# Altium PCB vt18_cpu_board.PcbDoc (part 7 of 7)
Units mil, origin at the board's own origin, x right, y up, seen from the top; angles counter-clockwise.
Board outline 2283.46 x 2244.09 mil, 8 copper layers (Top Layer, GND1, Signal Layer 1, POWER1, POWER2, Signal Layer 2, GND2, Bottom Layer), stack 66.304 mil thick; 339 components, 286 nets, 1965 pads, 1047 vias.
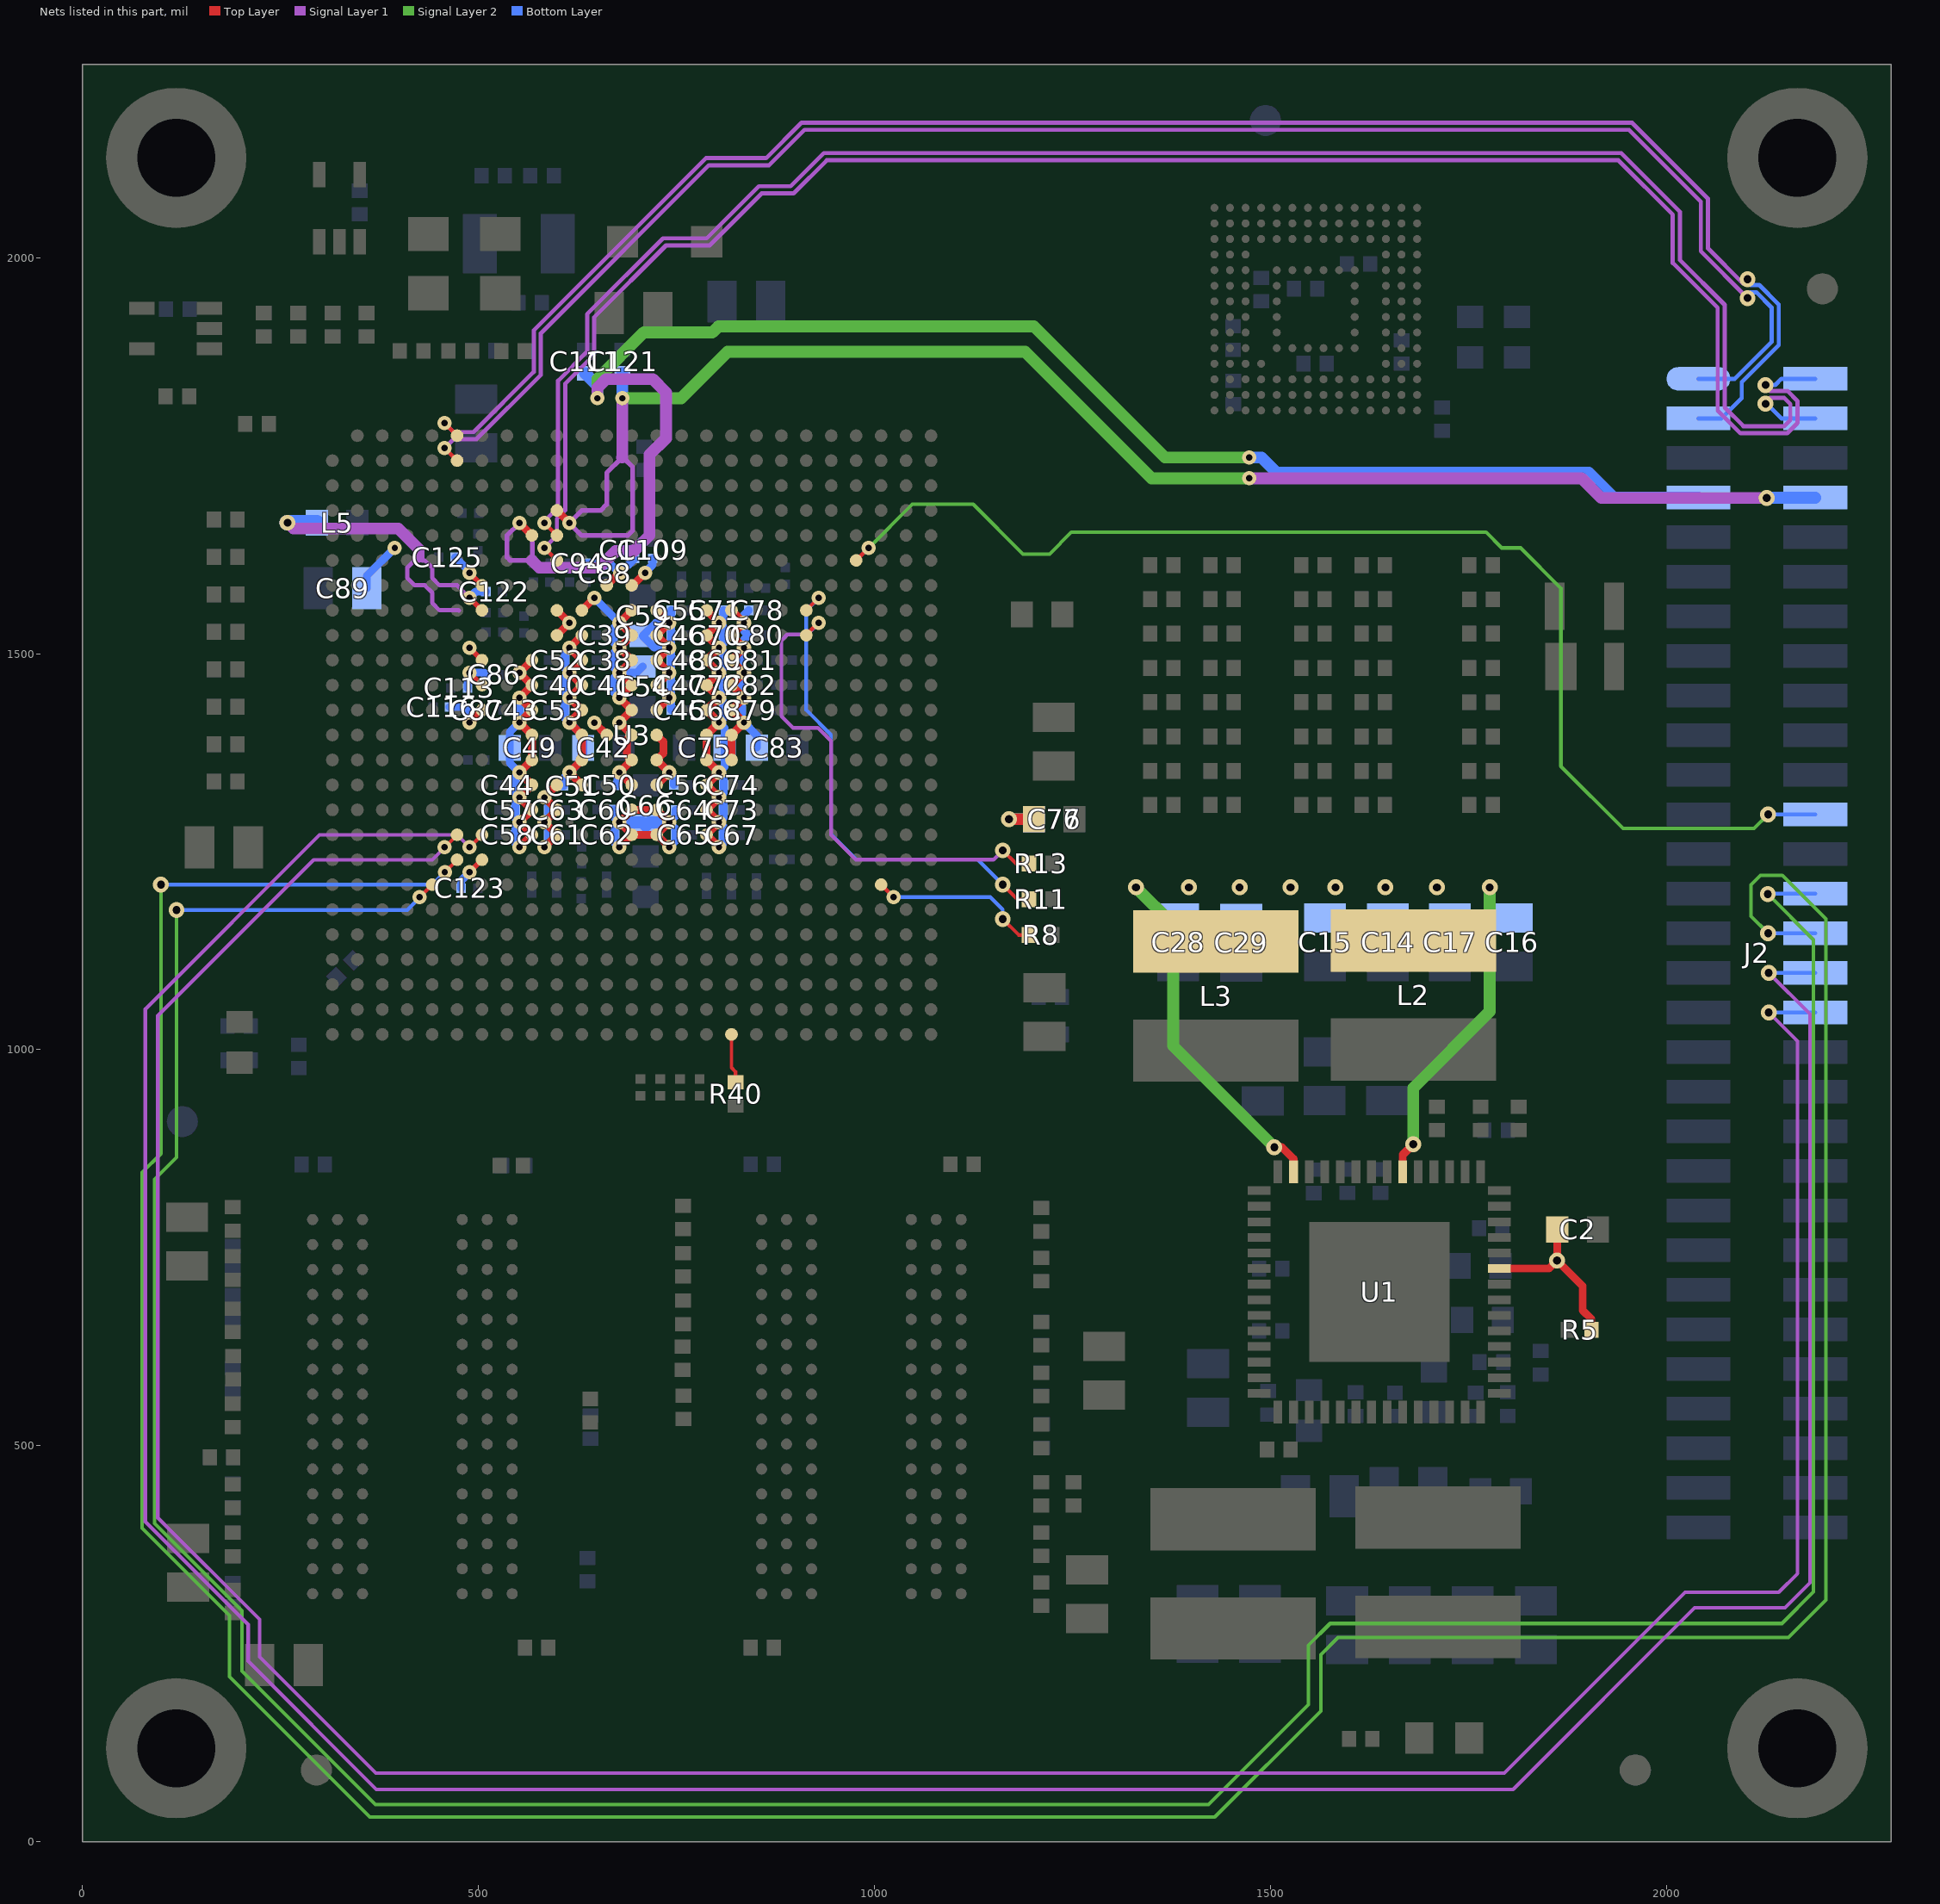
[diagram p13: the nets of this part, all layers, seen from the top]

## Via types
v1: diameter 18, hole 8, Top Layer to Bottom Layer, tented both sides, 718 vias
v2: diameter 20, hole 10, Top Layer to Bottom Layer, tented both sides, 300 vias
v3: diameter 25, hole 15, Top Layer to Bottom Layer, tented both sides, 27 vias
v4: diameter 17.99, hole 7.99, Top Layer to Bottom Layer, tented both sides, 2 vias

## Nets (pads, with @x,y where several pads share a name; then routed paths per layer and width w, separated by ;. In a path a pad name is that pad's centre, name@x,y a point inside that pad or via, vN(x,y) a via of type N, cw(c..) or ccw(c..) an arc to the next point about the centre after c; other vN are vias at no path point) (continued)
UART3-TXD: J2.24 U3.F22 | length 1572
  Top Layer w4.7: U3.F22@976.84,1617.81 v1(992.59,1633.57)
  Signal Layer 2 w4.5: v1(992.59,1633.57) 1047.71,1688.69 1124.58,1688.69 1187.57,1625.69 1220.94,1625.69 1248.5,1653.25 1772.12,1653.25 1791.81,1633.56 1815.82,1633.56 1866.61,1582.78 1866.61,1357.98 1945.35,1279.24 2110.52,1279.24 v2(2128.33,1297.05)
  Bottom Layer w4.7: v2(2128.33,1297.05) J2.24@2187.99,1297.05
UART4-RXD: J2.30 U3.V6 | length 4799
  Top Layer w4.7: v1@457.38,1224.11 v1(457.38,1224.33) U3.V6@472.91,1239.86
  Signal Layer 2 w4.5: v2(98.89,1208.37) 98.89,868.65 75.27,845.03 75.27,396.07 185.51,285.84 185.51,208.37 362.67,31.2 1429.6,31.2 1563.46,165.06 1563.46,236.22 1585.09,257.85 2153.86,257.85 2201.26,305.24 2201.26,1165.06 2146.14,1220.18 2118.58,1220.18 2106.77,1208.37 2106.77,1168.61 v2(2128.33,1147.05)
  Bottom Layer w4.7: v2(98.89,1208.37) 441.41,1208.36 v1(457.38,1224.33) ; v2(2128.33,1147.05) J2.30@2187.99,1147.05
UART4-TXD: J2.28 U3.W5 | length 4529.2
  Top Layer w4.7: v1(425.67,1192.62) U3.W5@441.41,1208.36
  Signal Layer 2 w4.5: v2(118.58,1176.47) 118.58,863.9 91.02,836.34 91.02,401.89 201.26,291.66 201.26,215.37 369.67,46.95 1421.73,46.95 1547.71,172.94 1547.71,248.03 1575.27,275.59 2145.67,275.59 2185.51,315.43 2185.51,1138.89 v2(2127.84,1196.56)
  Bottom Layer w4.7: v2(118.58,1176.47) 118.68,1176.37 409.91,1176.37 425.67,1192.13 v1(425.67,1192.62) ; v2(2127.84,1196.56) 2128.33,1197.05 J2.28@2187.99,1197.05
UART5-RXD: J2.34 U3.U6 | length 4224.9
  Top Layer w4.7: v1(457.16,1255.61) U3.U6@472.91,1271.36
  Signal Layer 1 w4.5: v1(457.16,1255.61) 441.41,1239.87 291.81,1239.87 94.96,1043.02 94.96,409.16 223.38,280.74 223.38,233.49 370.26,86.61 1795.28,86.61 2023.62,314.96 2141.73,314.96 2165.35,338.58 2165.35,1010.71 v2(2129.02,1047.05)
  Bottom Layer w4.7: v2(2129.02,1047.05) J2.34@2187.99,1047.05
UART5-TXD: J2.32 U3.U7 | length 4404.2
  Top Layer w4.7: v1(488.65,1255.61) U3.U7@504.4,1271.36
  Signal Layer 1 w4.5: v1(488.65,1255.61) 472.9,1271.36 299.28,1271.36 79.21,1051.29 79.21,404.16 209.13,274.23 209.13,228.06 371.01,66.17 1806.33,66.17 2035.43,295.28 2149.61,295.28 2181.1,326.77 2181.1,1044.96 v2(2129.02,1097.05)
  Bottom Layer w4.7: v2(2129.02,1097.05) J2.32@2187.99,1097.05
USB-H1-OC: R13.2 U3.J20 | length 644
  Top Layer w4.7: U3.J20@913.85,1523.32 913.85,1524.24 928.69,1539.08 v1(929.6,1539.08) ; v2(1161.88,1251.68) 1178.56,1235 R13.2@1195,1235
  Signal Layer 1 w4.7: v1(929.6,1539.08) 914.77,1524.24 889.86,1524.24 882.36,1516.74 882.36,1420.97 897.09,1406.24 928.51,1406.24 945.35,1389.39 945.35,1270.89 976.38,1239.87 1150.07,1239.87 v2(1161.88,1251.68)
USB-HOST-VBUS: C121.1 J2.8 U3.D10 | length 2046.5
  Top Layer w10: U3.D10@598.9,1680.8 v1(614.64,1665.06)
  Signal Layer 1 w6: 681.38,1747.74 661.88,1728.25 661.88,1688.69 654.01,1680.81 630.39,1680.81 v1(614.64,1665.06) 630.39,1649.32 688.53,1649.32 694.45,1655.24 694.45,1735.93 682.64,1747.74
  Signal Layer 1 w15: 681.38,1747.74 681.57,1747.93 v4(681.57,1822.54) ; v1(1472.91,1721.52) 1892.83,1721.52 1917.79,1696.56 v2(2126.45,1696.56)
  Signal Layer 2 w15: v4(681.57,1822.54) 755.61,1822.54 814.36,1881.29 1190.05,1881.29 1349.81,1721.52 v1(1472.91,1721.52)
  Bottom Layer w15: v4(681.57,1822.54) C121.1@681.57,1854.04 ; v2(2126.45,1696.56) 2126.94,1697.05 J2.8@2187.99,1697.05
USB-HOST_N: J2.2 U3.F10 | length 2344.5
  Top Layer w5.3: v1(583.14,1633.57) U3.F10@598.89,1617.81
  Signal Layer 1 w5.3: v1(583.14,1633.57) 598.89,1649.32 598.89,1670.46 609.38,1680.94 609.38,1840.9 646.14,1877.66 646.14,1924.91 736.69,2015.46 791.81,2015.46 857.61,2081.26 897.9,2081.26 939.69,2123.06 1939.19,2123.06 2007.87,2054.38 2007.87,1993.38 2064.5,1936.75 2064.5,1807.14 2093.3,1778.34 2152.36,1778.34 2165.35,1791.34 2165.35,1818.9 2152.42,1831.83 2130.39,1831.83 2125,1837.22 v2(2125,1839.18)
  Bottom Layer w5.3: v2(2125,1839.18) 2137.13,1839.18 2144.99,1847.05 J2.2@2187.99,1847.05
USB-HOST_P: J2.4 U3.E10 | length 2298.8
  Top Layer w5.3: v1(583.16,1665.06) U3.E10@598.89,1649.31
  Signal Layer 1 w5.3: v1(583.16,1665.06) 583.16,1667.45 600.38,1684.67 600.38,1844.63 637.14,1881.39 637.14,1928.63 732.96,2024.46 788.08,2024.46 853.88,2090.26 894.17,2090.26 935.97,2132.06 1942.92,2132.06 2016.87,2058.11 2016.87,1997.11 2073.5,1940.48 2073.5,1810.87 2097.03,1787.34 2148.63,1787.34 2156.35,1795.07 2156.35,1815.17 2148.69,1822.83 2130.39,1822.83 2125,1817.45 v2(2125,1815.48)
  Bottom Layer w5.3: v2(2125,1815.48) 2126.55,1815.48 2144.99,1797.05 J2.4@2187.99,1797.05
USB-OTG-ID: R8.2 U3.W23 | length 219.8
  Top Layer w4.7: U3.W23@1008.34,1208.36 v1(1024.09,1192.61) ; v2(1161.88,1165.06) 1181.95,1145 R8.2@1195,1145
  Bottom Layer w4.7: v1(1024.09,1192.61) 1146.15,1192.61 1161.88,1176.87 v2(1161.88,1165.06)
USB-OTG-OC: R11.2 U3.H20 | length 624.2
  Top Layer w4.5: U3.H20@913.85,1554.82 v1(929.6,1570.56)
  Top Layer w4.7: v2(1161.88,1208.37) 1180.26,1190 R11.2@1195,1190
  Bottom Layer w4.7: v1(929.6,1570.56) 913.87,1554.83 913.85,1428.84 944.95,1397.74 944.95,1272.16 976.85,1240.26 1129.99,1240.26 v2(1161.88,1208.37)
USB-OTG-VBUS: C111.1 J2.7 U3.E9 | length 2191.5
  Top Layer w10: v1(551.66,1665.04) U3.E9@567.4,1649.31
  Signal Layer 1 w6: 567.4,1617.82 539.84,1617.82 535.99,1621.67 535.99,1649.38 v1(551.66,1665.04) 567.84,1648.85 567.84,1625.35
  Signal Layer 1 w15: 567.4,1617.82 576.64,1608.58 651.96,1608.58 673.01,1629.63 696.06,1629.63 715.81,1649.38 715.81,1751.15 736.69,1772.03 736.69,1829.81 719.76,1846.74 661.03,1846.74 650.07,1835.79 v4(650.07,1822.54)
  Signal Layer 2 w15: v4(650.07,1822.54) 650.07,1846.92 708.66,1905.51 795.28,1905.51 803.15,1913.39 1201.26,1913.39 1366.9,1747.74 v1(1472.91,1747.74)
  Bottom Layer w5: v1(551.66,1665.04) v1@552.18,1665.04
  Bottom Layer w15: C111.1@634.33,1854.04 650.07,1838.29 v4(650.07,1822.54) ; v1(1472.91,1747.74) 1488.48,1747.74 1507.87,1728.35 1901.75,1728.35 1933.05,1697.05 J2.7@2040.35,1697.05
USB-OTG_N: J2.1 U3.B6 | length 2187.9
  Top Layer w5.3: v1(457.16,1759.55) U3.B6@472.91,1743.8
  Signal Layer 1 w5.3: v1(457.16,1759.55) 468.41,1770.8 497.47,1770.8 578.72,1852.05 578.72,1904.57 790.84,2116.69 866.89,2116.69 911.62,2161.42 1952.76,2161.42 2043.31,2070.87 2043.31,2008.11 v2(2102.36,1949.05)
  Bottom Layer w5.3: J2.1@2040.35,1847.05 2086.15,1847.05 2132.63,1893.53 2132.63,1937.18 2113.41,1956.4 2106.3,1956.4 2102.36,1952.46 v2(2102.36,1949.05)
USB-OTG_P: J2.3 U3.A6 | length 2245.4
  Top Layer w5.3: v1(457.16,1791.05) U3.A6@472.91,1775.29
  Signal Layer 1 w5.3: v1(457.16,1791.05) 468.41,1779.8 493.74,1779.8 569.72,1855.77 569.72,1908.3 787.11,2125.69 863.16,2125.69 907.89,2170.42 1956.48,2170.42 2052.31,2074.59 2052.31,2011.83 2096.83,1967.32 v2(2102.36,1972.85)
  Bottom Layer w5.3: J2.3@2040.35,1797.05 2069.46,1797.05 2094.96,1822.54 2094.96,1842.99 2141.73,1889.76 2141.73,1940.94 2117.18,1965.5 2106.3,1965.5 2102.36,1969.44 v2(2102.36,1972.85)
VCOREDIG: C2.1 R5.1 U1.51 | length 221.5
  Top Layer w10: U1.51@1789.02,723.67 1851.54,723.67 v2(1861.77,733.9) ; C2.1@1862.17,772.88 1862.17,734.3 v2(1861.77,733.9) ; R5.1@1905.08,646.5 1905.08,660.05 1894,671.14 1894,701.68 v2(1861.77,733.9)
VDDARM-CAP: C38.1 C39.1 C40.1 C41.1 C42.1 C50.1 C51.1 C52.1 C53.1 C54.1 U3.H11 U3.H13 U3.J11 U3.J13 U3.K11 U3.K13 U3.L11 U3.L13 U3.M11 U3.M13 U3.N11 U3.N13 U3.P11 U3.P13 U3.R11 U3.R13 | length 994.3
  Top Layer w10: U3.R11@630.39,1334.35 v1(614.64,1350.1) U3.P11@630.39,1365.84 U3.N11@630.39,1397.34 v1(614.64,1413.09) U3.M11@630.39,1428.84 v1(614.64,1444.58) U3.L11@630.39,1460.33 v1(614.64,1476.08) U3.K11@630.39,1491.83 v1(614.64,1507.58) U3.J11@630.39,1523.32 ; U3.H11@630.39,1554.82 v1(646.15,1570.57) ; U3.R13@693.38,1334.35 v1(677.63,1350.1) U3.P13@693.38,1365.84 687.38,1371.84 687.38,1391.34 U3.N13@693.38,1397.34 v1(677.63,1413.09) U3.M13@693.38,1428.84 v1(677.63,1444.58) U3.L13@693.38,1460.33 v1(677.63,1476.08) U3.K13@693.38,1491.83 v1(677.63,1507.58) U3.J13@693.38,1523.32 v1(677.63,1539.07) U3.H13@693.38,1554.82
  Bottom Layer w10: C51.1@607.38,1333 607.38,1342.84 v1(614.64,1350.1) 632.09,1367.55 C42.1@632.09,1381.12 632.09,1395.64 v1(614.64,1413.09) 608.81,1418.92 C53.1@608.81,1428.76 608.81,1438.76 v1(614.64,1444.58) 609.2,1450.02 C40.1@609.2,1460.26 609.2,1470.65 v1(614.64,1476.08) 609.2,1481.52 C52.1@609.2,1491.75 609.2,1502.15 v1(614.64,1507.58) ; v1(646.15,1570.57) v1(677.63,1539.07) 669.83,1531.28 C39.1@669.83,1523.25 669.83,1515.38 v1(677.63,1507.58) 669.83,1499.79 C38.1@669.83,1491.75 669.83,1483.88 v1(677.63,1476.08) ; C50.1@675.24,1333.85 675.24,1347.71 v1(677.63,1350.1) ; v1(677.63,1444.58) 670.23,1451.98 C41.1@670.23,1460.26 670.23,1468.68 v1(677.63,1476.08) ; C54.1@707.24,1483.88 699.44,1476.08 v1(677.63,1476.08)
VDDARM-SW1AB: C14.1 C15.1 C16.1 C17.1 C43.1 C44.1 C45.1 C46.1 C47.1 C48.1 C49.1 C55.1 C56.1 C57.1 C58.1 C59.1 L2.2 U1.6 U3.H14 U3.J14 U3.K9 U3.K14 U3.L9 U3.L14 U3.M9 U3.M14 U3.N9 U3.N14 U3.P9 U3.P14 U3.R9 U3.R14 U3.T9 U3.U9 | length 1432.2
  Top Layer w10: v1(551.65,1255.61) U3.U9@567.4,1271.36 v1(551.65,1287.1) U3.T9@567.4,1302.85 v1(551.65,1318.6) U3.R9@567.4,1334.35 v1(551.65,1350.1) U3.P9@567.4,1365.84 U3.N9@567.4,1397.34 v1(551.65,1413.09) U3.M9@567.4,1428.84 v1(551.65,1444.58) U3.L9@567.4,1460.33 v1(551.65,1476.08) U3.K9@567.4,1491.83 ; U3.R14@724.88,1334.35 v1(740.62,1350.1) ; U3.N14@724.88,1397.34 733.38,1388.84 733.38,1374.34 U3.P14@724.88,1365.84 v1(740.62,1350.1) ; U3.M14@724.88,1428.84 v1(740.62,1444.58) U3.L14@724.88,1460.33 v1(740.62,1476.08) U3.K14@724.88,1491.83 v1(740.62,1507.58) U3.J14@724.88,1523.32 v1(740.62,1539.07) U3.H14@724.88,1554.82 ; U1.6@1666.9,845.79 1666.9,867.29 v2(1680.28,880.67)
  Signal Layer 2 w15: v2(1680.28,880.67) 1680.28,951.91 1776.85,1048.48 v2(1776.85,1205)
  Bottom Layer w10: v1(551.65,1255.61) 546.61,1260.66 C58.1@546.61,1271.28 546.61,1282.06 v1(551.65,1287.1) 546.61,1292.15 C57.1@546.61,1302.78 546.61,1313.56 v1(551.65,1318.6) 546.21,1324.04 C44.1@546.21,1334.27 546.21,1344.67 v1(551.65,1350.1) 539.28,1362.48 C49.1@539.28,1381.12 539.28,1400.72 v1(551.65,1413.09) 551.72,1413.17 C43.1@551.72,1428.76 551.72,1444.51 v1(551.65,1444.58) ; v1(740.62,1350.1) 746.61,1344.12 C56.1@746.61,1334.27 ; C45.1@743.3,1428.76 743.3,1441.9 v1(740.62,1444.58) 743.3,1447.27 C47.1@743.3,1460.26 743.3,1473.4 v1(740.62,1476.08) 743.3,1478.77 C48.1@743.3,1491.75 743.3,1504.9 v1(740.62,1507.58) ; C55.1@743.3,1554.75 743.3,1541.76 v1(740.62,1539.07) ; v1(740.62,1507.58) 722.11,1507.58 C59.1@707.24,1522.46 723.85,1539.07 v1(740.62,1539.07) ; v1(740.62,1507.58) 743.3,1510.27 C46.1@743.3,1523.25 743.3,1536.39 v1(740.62,1539.07)
  other v2: 1582,1205 1645,1205 1710.09,1205
VDDHIGH-CAP: C87.1 C88.1 C89.1 C94.2 C110.1 C116.1 C123.1 C125.1 U3.G7 U3.G12 U3.H10 U3.J10 U3.K7 U3.M7 U3.V7 | length 389.9
  Top Layer w7: v1(488.65,1224.11) U3.V7@504.4,1239.86 ; v1(488.65,1507.58) U3.K7@504.4,1491.83 ; v1(488.65,1602.07) U3.G7@504.4,1586.32
  Top Layer w10: v1(488.65,1413.09) U3.M7@504.4,1428.84 ; U3.J10@598.89,1523.32 v1(614.65,1539.07) U3.H10@598.89,1554.82 ; U3.G12@661.88,1586.32 677.63,1602.07 v1(679,1602) v1(679,1602)
  Bottom Layer w10: C89.1@358.81,1582.7 358.81,1598.21 v1(394.17,1633.56) ; C116.1@463.54,1432.7 482.83,1432.7 C87.1@486.76,1428.76 488.65,1426.88 v1(488.65,1413.09) ; C125.1@470.62,1621.67 488.65,1603.65 v1(488.65,1602.07) ; C123.1@478.1,1203.96 478.1,1213.57 v1(488.65,1224.11) ; C94.2@635.34,1614.19 657.24,1614.19 C88.1@659.2,1612.23 667.48,1612.23 677.7,1602 678.9,1602 v1(679,1602) C110.1@697,1620.1
VDDPU-CAP: C78.1 C79.1 C80.1 C81.1 C82.1 C83.1 U3.H17 U3.J17 U3.K17 U3.L17 U3.M17 U3.N17 U3.P17 | length 448.9
  Top Layer w10: U3.P17@819.36,1365.84 U3.N17@819.36,1397.34 v1(835.11,1413.09) U3.M17@819.36,1428.84 v1(835.11,1444.58) U3.L17@819.36,1460.33 v1(835.11,1476.08) U3.K17@819.36,1491.83 v1(835.11,1507.58) U3.J17@819.36,1523.32 v1(835.11,1539.07) U3.H17@819.36,1554.82
  Bottom Layer w10: C78.1@841.09,1554.75 835.11,1548.76 v1(835.11,1539.07) 835.11,1528.84 C80.1@840.7,1523.25 835.11,1517.66 v1(835.11,1507.58) 832.04,1504.52 C81.1@832.04,1491.75 832.04,1479.15 v1(835.11,1476.08) 832.04,1473.02 C82.1@832.04,1460.26 832.04,1447.65 v1(835.11,1444.58) 832.04,1441.52 C79.1@832.04,1428.76 832.04,1416.16 v1(835.11,1413.09) 851.33,1396.87 C83.1@851.33,1381.52
VDDSOC-CAP: C60.1 C61.1 C62.1 C63.1 C64.1 C65.1 C66.1 C86.1 C109.1 C113.1 C122.1 L5.1 U3.G13 U3.H7 U3.L7 U3.N12 U3.R10 U3.T10 U3.T13 U3.T14 U3.U10 U3.U13 U3.U14 | length 1179.1
  Top Layer w7: v1(488.65,1476.08) U3.L7@504.4,1460.33 ; v1(488.65,1570.57) U3.H7@504.4,1554.82
  Top Layer w10: v1(583.14,1255.61) U3.U10@598.89,1271.36 v1(583.14,1287.1) U3.T10@598.89,1302.85 v1(583.14,1318.6) U3.R10@598.89,1334.35 ; v1(646.14,1412.85) 661.65,1397.34 U3.N12@661.88,1397.34 ; v1(677.63,1255.61) U3.U13@693.38,1271.36 ; U3.G13@693.38,1586.32 694.61,1586.32 v1(710.24,1601.96) ; v1(740.62,1255.61) U3.U14@724.88,1271.36 ; U3.U13@693.38,1271.36 U3.U14@724.88,1271.36 ; U3.U13@693.38,1271.36 v1(677.63,1287.1) U3.T13@693.38,1302.85 U3.T14@724.88,1302.85 v1(740.62,1287.1) U3.U14@724.88,1271.36
  Signal Layer 1 w5.5: 475,1554.58 474.71,1554.87 450.66,1554.87 441.46,1564.07 441.46,1576.97 432.06,1586.37 419.16,1586.37 409.96,1595.57 409.96,1608.58 419.16,1617.77 419.63,1617.77 424.38,1622.52 429.13,1617.77 432.16,1617.77 441.46,1608.48 441.46,1595.57 450.66,1586.37 472.85,1586.37 v1(488.65,1570.57)
  Signal Layer 1 w15: v2(258.81,1665.38) 266.19,1658 398.65,1658 424.38,1632.27 424.38,1622.52
  Bottom Layer w10: C113.1@485.98,1456.71 485.98,1473.41 v1(488.65,1476.08) 506.76,1476.08 C86.1@509.2,1473.64 ; v1(488.65,1570.57) 496.44,1578.37 C122.1@509.2,1578.37 ; v1(583.14,1255.61) 588.34,1260.81 C61.1@588.34,1271.28 588.34,1281.9 v1(583.14,1287.1) 588.34,1292.3 C63.1@588.34,1302.78 588.34,1313.4 v1(583.14,1318.6) ; C60.1@671.02,1303.17 671.02,1293.72 v1(677.63,1287.1) 672.2,1281.67 C62.1@672.2,1271.28 672.2,1261.05 v1(677.63,1255.61) ; v1@709.24,1601.96 709.74,1602.46 719.83,1612.55 C109.1@719.83,1620.1 ; v1(740.62,1255.61) 748.97,1263.96 C65.1@748.97,1271.28 748.97,1278.75 v1(740.62,1287.1) 748.97,1295.45 C64.1@748.97,1302.78
  Bottom Layer w15: v1(677.63,1287.1) 706.77,1287.1 C66.1@711.17,1282.7 715.58,1287.1 v1(740.62,1287.1)
  Bottom Layer w20: v2(258.81,1665.38) L5.1@295.82,1665.38
VDDSOC-SW1C: C28.1 C29.1 C67.1 C68.1 C69.1 C70.1 C71.1 C72.1 C73.1 C74.1 C75.1 C76.1 C77.1 L3.2 U1.13 U3.H16 U3.J16 U3.K16 U3.L16 U3.M16 U3.N16 U3.P16 U3.R16 U3.T16 U3.U16 | length 1260.6
  Top Layer w10: U3.H16@787.87,1554.82 v1(803.62,1539.07) U3.J16@787.87,1523.32 v1(803.62,1507.58) U3.K16@787.87,1491.83 v1(803.62,1476.08) U3.L16@787.87,1460.33 v1(803.62,1444.58) U3.M16@787.87,1428.84 v1(803.62,1413.09) U3.N16@787.87,1397.34 U3.P16@787.87,1365.84 v1(803.61,1350.1) U3.R16@787.87,1334.35 v1(803.62,1318.6) U3.T16@787.87,1302.85 v1(803.62,1287.1) U3.U16@787.87,1271.36 v1(803.62,1255.61) ; v2(1504.76,876.79) 1514.41,876.79 1529.1,862.1 U1.13@1529.1,845.79
  Top Layer w15: v2(1169.76,1291.05) C77.1@1201.26,1291.05
  Signal Layer 2 w15: v2(1330,1205) 1377,1158 1377,1004.55 v2(1504.76,876.79)
  Bottom Layer w10: v1(803.62,1255.61) 809.2,1261.2 C67.1@809.2,1270.89 809.2,1281.52 v1(803.62,1287.1) 809.2,1292.69 C73.1@809.2,1302.78 809.2,1313.02 v1(803.62,1318.6) 809.6,1324.58 C74.1@809.6,1334.27 809.6,1344.11 v1(803.61,1350.1) 810.78,1357.28 C75.1@810.78,1381.52 810.78,1405.93 v1(803.62,1413.09) 809.2,1418.68 C68.1@809.2,1428.76 809.2,1439 v1(803.62,1444.58) 809.2,1450.17 C72.1@809.2,1460.26 809.2,1470.5 v1(803.62,1476.08) 809.2,1481.67 C69.1@809.2,1491.75 809.2,1502 v1(803.62,1507.58) 809.2,1513.17 C70.1@809.2,1523.25 809.2,1533.49 v1(803.62,1539.07) 809.2,1544.66 C71.1@809.2,1554.75
  Bottom Layer w15: v2(1169.76,1291.05) C76.1@1201.26,1291.05
  other v2: 1397,1205 1461,1205 1525.24,1205
ZQPAD: R40.1 U3.AE17 | length 62.4
  Top Layer w4.7: U3.AE17@819.36,1019.39 819.36,977.36 824.38,972.34 R40.1@824.38,959.1
pads on no net: J2.43 J2.44 J2.45 J2.46 J2.48 U1.2 U1.16 U1.17 U1.18 U1.19 U1.21 U1.26 U1.27 U1.28 U1.33 U1.39 U1.44 U1.46 U2.A1 U2.A2 U2.A7 U2.A8 U2.A9 U2.A10 U2.A11 U2.A12 U2.A13 U2.A14 U2.B1 U2.B7 U2.B8 U2.B9 U2.B10 U2.B11 U2.B12 U2.B13 U2.B14 U2.C1 U2.C3 U2.C5 U2.C7 U2.C8 U2.C9 U2.C10 U2.C11 U2.C12 U2.C13 U2.C14 U2.D1 U2.D2 U2.D3 U2.D4 U2.D12 U2.D13 U2.D14 U2.E1 U2.E2 U2.E3 U2.E5 U2.E8 U2.E9 U2.E10 U2.E12 U2.E13 U2.E14 U2.F1 U2.F2 U2.F3 U2.F10 U2.F12 U2.F13 U2.F14 U2.G1 U2.G2 U2.G3 U2.G10 U2.G12 U2.G13 U2.G14 U2.H1 U2.H2 U2.H3 U2.H5 U2.H12 U2.H13 U2.H14 U2.J1 U2.J2 U2.J3 U2.J12 U2.J13 U2.J14 U2.K1 U2.K2 U2.K3 U2.K6 U2.K7 U2.K10 U2.K12 U2.K13 U2.K14 U2.L1 U2.L2 U2.L3 U2.L12 U2.L13 U2.L14 U2.M1 U2.M2 U2.M3 U2.M7 U2.M8 U2.M9 U2.M10 U2.M11 U2.M12 U2.M13 U2.M14 U2.N1 U2.N3 U2.N6 U2.N7 U2.N8 U2.N9 U2.N10 U2.N11 U2.N12 U2.N13 U2.N14 U2.P1 U2.P2 U2.P7 U2.P8 U2.P9 U2.P10 U2.P11 U2.P12 U2.P13 U2.P14 U3.A3 U3.A9 U3.A10 U3.A11 U3.A12 U3.A14 U3.A15 U3.A16 U3.A17 U3.A18 U3.A19 U3.A21 U3.A22 U3.A23 U3.A24 U3.AA1 U3.AA2 U3.AA3 U3.AA4 U3.AA11 U3.AB1 U3.AB2 U3.AB17 U3.AD17 U3.B1 U3.B2 U3.B3 U3.B8 U3.B9 U3.B10 U3.B11 U3.B12 U3.B13 U3.B14 U3.B15 U3.B16 U3.B18 U3.B21 U3.B22 U3.B23 U3.B24 U3.B25 U3.C5 U3.C7 U3.C8 U3.C13 U3.C15 U3.C16 U3.C17 U3.C18 U3.C20 U3.C21 U3.C22 U3.C23 U3.C24 U3.C25 U3.D1 U3.D2 U3.D5 U3.D7 U3.D13 U3.D14 U3.D15 U3.D16 U3.D17 U3.D20 U3.D21 U3.D22 U3.D23 U3.D24 U3.E1 U3.E2 U3.E3 U3.E4 U3.E13 U3.E14 U3.E15 U3.E17 U3.E19 U3.E20 U3.E21 U3.E23 U3.E24 U3.E25 U3.F1 U3.F2 U3.F3 U3.F4 U3.F13 U3.F14 U3.F15 U3.F16 U3.F18 U3.F19 U3.F20 U3.F21 U3.G1 U3.G2 U3.G6 U3.G20 U3.G21 U3.G23 U3.H1 U3.H2 U3.H3 U3.H4 U3.H5 U3.H19 U3.H21 U3.H24 U3.J3 U3.J4 U3.J5 U3.J6 U3.J19 U3.J23 U3.J24 U3.K3 U3.K4 U3.K5 U3.K6 U3.L1 U3.L3 U3.L4 U3.L6 U3.M2 U3.M4 U3.M5 U3.M6 U3.N1 U3.N2 U3.N3 U3.N4 U3.N19 U3.N20 U3.N21 U3.N22 U3.N25 U3.P1 U3.P2 U3.P3 U3.P4 U3.P25 U3.R1 U3.R2 U3.R6 U3.R20 U3.R21 U3.T1 U3.T2 U3.T4 U3.T5 U3.T20 U3.T21 U3.T22 U3.T23 U3.T24 U3.T25 U3.U1 U3.U2 U3.U3 U3.U4 U3.U20 U3.U21 U3.U22 U3.U23 U3.U24 U3.U25 U3.V1 U3.V2 U3.V3 U3.V4 U3.V20 U3.V21 U3.V22 U3.V23 U3.V24 U3.V25 U3.W1 U3.W2 U3.W4 U3.W6 U3.W20 U3.W21 U3.W22 U3.W24 U3.Y1 U3.Y2 U3.Y3 U3.Y4 U7.J1 U7.J9 U7.L1 U7.L9 U8.J1 U8.J9 U8.L1 U8.L9 U9.J1 U9.J9 U9.L1 U9.L9 U10.J1 U10.J9 U10.L1 U10.L9
copper on no net:
  other v1: 685.33,126.39 627.83,201.39 1100.33,271.39 1157.83,271.39 590.33,458.89 1160.38,481.34 162.83,551.39 405.33,583.89 741.63,908.89

## Polygon pours and split planes (outlines as drawn)
P3V0-VDDHIGH-SW2 on Top Layer "Top Layer-No Net 1" (solid, remove dead copper, pour order 27): 680,1890 641.1,1890 640,1890 635,1895 635,1915 620,1930 620,2075 620,2118.16 627.83,2125.98 692.4,2125.98 700,2118.38 700,2000 690,1990 690,1950 690,1895.12 684.88,1890
NetL3_1 on Top Layer "Top Layer-No Net" (solid, pour order 31): 1301.49,1043.17 1285.87,1027.55 1285.87,962.42 1285.87,942.08 1298.36,929.58 1308.26,919.68 1349.49,919.68 1565.63,919.68 1568.47,916.84 1568.47,942.17 1554.26,956.38 1537.37,973.27 1537.37,1005.81 1537.37,1032.86 1527.06,1043.17
NetL2_1 on Top Layer "Top Layer-No Net" (solid, pour order 32): 1601.5,1037.07 1786.22,1037.07 1794.45,1028.84 1794.45,950.79 1785.83,942.17 1692.43,942.17 1687.37,937.1 1648.03,937.1 1632.36,921.43 1632.36,870.98 1627.53,866.14 1610.13,866.14 1604.41,871.86 1604.41,903.34 1600.6,903.34 1578.11,925.83 1582,929.72 1582,948.03 1582,950.83 1572.32,960.5 1572.32,1032.4 1577,1037.07
NetL2_1 on Top Layer "Top Layer-No Net" (solid, pour order 33): 1578.11,925.83 1578.11,988.67 1587.37,997.92 1626.52,1037.07 1787.2,1037.07 1808.68,1037.07 1813.34,1032.41 1813.34,957.64 1803.74,948.03 1798.04,942.34 1786,942.34 1638.75,942.34 1612.68,916.27 1587.67,916.27 1582.51,921.43
VDDSOC-SW1C on Top Layer "Top Layer-No Net" (solid, pour order 35): 1326.76,1216 1529.73,1216 1537.37,1208.36 1537.37,1088.59 1534.34,1085.56 1316.75,1085.56 1304.56,1097.75 1304.56,1205.84 1307.08,1208.36
VDDARM-SW1AB on Top Layer "Top Layer-No Net" (solid, pour order 36): 1597.21,1216 1827.56,1216 1837.72,1205.84 1837.72,1102.16 1824.15,1088.59 1568.06,1088.59 1558.89,1097.75 1558.89,1208 1566.89,1216
NetL4_1 on Top Layer "Top Layer-No Net" (solid, pour order 39): 1341,708.66 1443.89,708.66 1456.98,695.57 1456.98,682.98 1452,678 1420.86,678 1412,669.14 1412,511.27 1436,487.27 1457.27,466 1513,466 1550.76,466 1564,452.76 1564,359.5 1558,353.5 1336.5,353.5 1329,361 1329,698.66 1339,708.66
NetL1_1 on Top Layer "Top Layer-No Net" (solid, pour order 42): 1620,499.26 1640.87,499.26 1648,492.13 1651,489.13 1651,482.05 1651,480 1660,471 1679.9,451.1 1798.04,451.1 1818.9,451.1 1826,444 1826,362.5 1822,358.5 1598.5,358.5 1591,366 1591,456 1611,476 1614.99,479.99 1614.99,494.59 1614.99,496.4 1617.84,499.26
P1V5-DDR-SW3 on Top Layer "Top Layer-No Net" (solid, pour order 44): 1628,315 1861,315 1866,310 1866,199 1859,192 1608,192 1601,199 1601,309 1607,315
P3V0-VDDHIGH-SW2 on Top Layer "Top Layer-No Net" (solid, pour order 46): 1369,314 1558.97,314 1565.63,307.34 1565.63,194.86 1558.77,188 1346,188 1340,194 1340,308 1346,314
GND on Top Layer "Top Layer-No Net 1" (solid, remove dead copper, pour order 29): 0,2240.16 0,0 2283.46,0 2283.46,2244.09
VDDSOC-SW1C on Bottom Layer "Top Layer-No Net" (solid, pour order 43): 1330,1217 1530,1217 1537,1210 1537,1201.87 1521,1185.87 1503,1167.87 1503,1157 1490.97,1144.97 1472.81,1144.97 1311.03,1144.97 1305,1151 1305,1210 1312,1217
VDDARM-SW1AB on Bottom Layer "Top Layer-No Net" (solid, pour order 45): 1594,1216 1829,1216 1839,1206 1839,1150 1833,1144 1544,1144 1539,1149 1539,1186 1552,1199 1569,1216 1580,1216
MAIN-POWER on Bottom Layer "Top Layer-No Net" (solid, pour order 48): 1453.54,955 1679.76,955 1682.76,952 1682.76,910.76 1664,892 1659,887 1659,874.07 1659,839.23 1656.77,837 1540.86,837 1536.86,841 1536.86,873.14 1516,894 1501,909 1468,909 1449.42,909 1447,911.42 1445,913.42 1445,950 1445,952 1448,955
GND on Bottom Layer "Top Layer-No Net" (solid, pour order 49): 1342,1127 1838,1127 1845,1120 1845,985 1837,977 1835.61,975.61 1338,975.61 1333.14,975.61 1323,985.75 1323,1120 1330,1127
MAIN-POWER on Bottom Layer "Top Layer-No Net" (solid, pour order 50): 1419,675.32 1486.35,675.32 1493.68,668 1495,666.68 1495,648 1495,604.13 1476.87,586 1471.96,581.09 1445,581.09 1396.91,581.09 1390,588 1390,662.32 1403,675.32
MAIN-POWER on Bottom Layer "Top Layer-No Net" (solid, pour order 51): 1589.61,548 1669.34,548 1672,545.34 1677,540.34 1677,510 1677,478.61 1671,472.61 1671,419.95 1662,410.95 1578.05,410.95 1571,418 1571,480.61 1578,487.61 1578,540 1586,548
GND on Bottom Layer "Top Layer-No Net" (solid, pour order 52): 1368.83,281.83 1860.83,281.83 1864,285 1864,450.96 1849.96,465 1804.66,465 1799,459.34 1799,403.54 1792.88,397.41 1737.2,397.41 1727,407.61 1727,469.17 1723,473.17 1686.72,473.17 1685,471.45 1682,468.45 1682,428 1682,410 1675,403 1668,396 1578,396 1563.15,396 1552,407.15 1552,469.17 1549,469.17 1512,469.17 1506,468.82 1352.93,468.82 1348,463.89 1348,288.83 1355,281.83
P3V0-VDDHIGH-SW2 on Bottom Layer "Top Layer-No Net" (solid, pour order 38): 1426,267 1522,267 1528,261 1528,194.34 1523,189.34 1370.3,189.34 1365.65,194 1365.65,263.03 1369.61,267
P1V5-DDR-SW3 on Bottom Layer "Top Layer-No Net" (solid, pour order 41): 1592,265 1866,265 1872,259 1872,200.34 1866,194.34 1567.66,194.34 1560,202 1560,256.11 1566.89,263 1568.89,265 1572,265
GND on Bottom Layer "Top Layer-No Net" (solid, pour order 47): 1433,837.04 1468.3,837.04 1474,831.34 1477.34,828 1683,828 1752.95,828 1762,818.95 1772,808.95 1772,763 1772,761 1767,756 1763,752 1763,633 1763,630.85 1769.85,624 1773,620.85 1773,612.58 1773,560 1771,558 1741,558 1733,566 1730,569 1691,569 1683,569 1678,564 1670.74,556.74 1659,556.74 1488.26,556.74 1485,560 1485,579.04 1497,591.04 1507.5,600 1507.5,630.85 1507.5,659 1507.5,734.5 1474,768 1427.5,814.5 1426.5,833.5 1429,837 1430,837
GND on Bottom Layer "Top Layer-No Net 1" (solid, remove dead copper, pour order 30): 0,0 2283.46,0 2283.46,2244.09 0,2244.09
VDDHIGH-CAP on Signal Layer 2 "Signal Layer 2-No Net" (solid, pour order 37): 471.56,1367.17 466.5,1372.24 466.5,1385.85 466.5,1403.74 465.03,1405.21 361.19,1509.05 361.19,1553.49 428.49,1553.49 437.85,1544.13 516,1465.98 516,1370 508.29,1362.29 483.59,1362.29 476.45,1362.29
VDDHIGH-CAP on Signal Layer 2 "Signal Layer 2-No Net" (solid, pour order 34): 385.61,1644 402.38,1644 411.38,1635 433.63,1612.75 604,1612 593.93,1622.07 604,1612 620,1596 648,1596 658.56,1596 674,1611.44 677.63,1614.22 689.78,1614.22 693.8,1610.2 696,1608 699,1605 699,1599 699,1178 694,1173 670.38,1173 489,1173 481,1181 471.39,1190.61 471.39,1218.79 471.39,1238.35 488.65,1255.61 500.38,1267.34 500.38,1291 500.38,1338.36 488.65,1350.09 471.56,1367.17 471.56,1396 471.56,1405.51 429.07,1448 361.19,1515.89 361.19,1621.32 361.19,1637.06 368.13,1644
VDDSOC-CAP on Signal Layer 1 "Signal Layer 2-No Net" (solid, pour order 40): 700,1602.07 700,1612 733.38,1612 752.7,1590 768,1590 780,1590 788,1582 791,1579 791,1508 791,1181.24 783.38,1173.62 509.89,1173.62 506,1177.51 506,1332.74 488.65,1350.09 469.95,1368.79 469.95,1390 469.95,1566.95 476,1573 485,1584.02 495.98,1584.02 514.91,1565.09 514.91,1534.09 524.78,1524.22 691.7,1524.22 700,1534.09
P3V0-VDDHIGH-SW2 on Signal Layer 1 "Top Layer-No Net 1" (solid, remove dead copper, pour order 28): 1870,1035.14 1968.97,1035.14 1972.91,1031.2 1972.91,948.53 1468.97,948.53 1405.98,885.54 1405.98,570.57 1539.84,436.72 1539.84,180.81 1531.96,172.94 1315.43,172.94 1307.55,180.81 1307.55,1003.65 1339.05,1035.14
GND on GND1 (split plane): 2263.37,20.1 20.1,20.1 20.1,2224 2263.37,2224
PMIC-VSNVS on POWER1 (split plane): 917.37,2040.42 917.37,1849.02 693.4,1625.05 617.78,1549.43 564.18,1603.03 562,1605.21 574.18,1617.4 712.74,1755.95 713.84,1757.61 714.23,1759.56 714.23,1808.02 824.6,1918.4 825.71,1920.05 826.1,1922 826.1,2005 825.71,2006.95 824.6,2008.6 822.95,2009.71 821,2010.1 729.51,2010.1 729.51,2024.59 729.51,2094.9 862.89,2094.9
NetC114_1 on POWER1 (split plane): 815.9,1924.11 705.53,1813.74 704.42,1812.08 704.03,1810.13 704.03,1761.67 566.97,1624.61 566.97,1624.6 557.46,1615.1 493.75,1678.82 493.75,1725.93 728.01,1960.19 729.12,1961.85 729.51,1963.8 729.51,1999.9 815.9,1999.9
VDDARM-CAP on POWER1 (split plane): 691.9,1551.89 691.9,1404.28 691.9,1265.7 588.24,1265.7 588.24,1401.86 588.24,1413.09 588.24,1505.47 603.6,1520.84 621.38,1538.62 663.28,1580.51
P1V5-DDR-SW3 on POWER1 (split plane): 890.96,1311.47 919.51,1282.92 919.51,1192.62 919.86,1190.01 920.86,1187.58 922.47,1185.49 922.48,1185.48 924.57,1183.87 927,1182.87 929.61,1182.52 1125.34,1182.52 1214,1093.87 1241.42,1066.45 1241.29,1065.51 1241.29,754.98 1241.29,725.62 1241.64,723.01 1242.64,720.58 1244.25,718.49 1421.87,540.87 1422.87,539.87 1424.96,538.26 1427.39,537.26 1430,536.91 1794.82,536.91 1863.91,467.82 1863.91,20.1 143.09,20.1 143.09,637.61 142.74,640.22 142.45,640.94 141.74,642.66 140.13,644.75 118.09,666.79 118.09,843.39 118.09,959.93 340.69,1182.54 488.66,1182.54 491.27,1182.88 493.7,1183.89 495.79,1185.49 555.83,1245.53 778,1245.53 780.61,1245.87 783.04,1246.88 785.13,1248.48 848.12,1311.47 863.56,1326.91 875.52,1326.91
P3V0-VDDHIGH-SW2 on POWER1 (split plane): 719.31,2100 719.31,2082.68 719.31,2024.59 719.31,2005 719.31,1965.91 485.04,1731.64 483.94,1729.99 483.55,1728.04 483.55,1676.71 483.94,1674.76 485.04,1673.1 550.65,1607.49 550.29,1606.95 549.9,1605 550.29,1603.05 551.39,1601.39 556.97,1595.82 610.57,1542.22 596.4,1528.05 581.03,1512.68 553.89,1512.68 552.77,1512.46 551.65,1512.68 533.9,1512.68 512.97,1533.61 512.97,1559.06 512.58,1561.01 511.48,1562.66 509.82,1563.76 507.87,1564.15 380.08,1564.15 367.77,1576.47 367.77,1869.27 550,2051.51 551.11,2053.17 551.5,2055.12 551.5,2136.63 719.31,2136.63
P3V3-PERI on POWER1 (split plane): 2263.37,20.1 1884.09,20.1 1884.09,472 1883.74,474.61 1882.74,477.04 1881.13,479.13 1806.13,554.13 1804.04,555.73 1801.61,556.74 1799,557.09 1434.18,557.09 1261.46,729.8 1261.46,754.98 1261.46,1061.43 1262.74,1063.09 1263.74,1065.52 1264.09,1068.13 1263.74,1070.74 1262.74,1073.17 1261.13,1075.26 1228.26,1108.13 1136.65,1199.74 1134.56,1201.34 1132.13,1202.35 1129.52,1202.69 939.68,1202.69 939.68,1287.1 939.34,1289.71 938.33,1292.14 936.73,1294.23 905.22,1325.74 886.83,1344.13 884.74,1345.74 882.31,1346.74 879.7,1347.09 859.39,1347.09 856.78,1346.74 854.34,1345.74 852.25,1344.13 833.86,1325.74 773.82,1265.7 702.1,1265.7 702.1,1404.28 702.1,1554 701.71,1555.95 700.6,1557.6 670.49,1587.72 700.6,1617.84 926.07,1843.31 927.18,1844.96 927.56,1846.91 927.56,2042.53 927.18,2044.48 926.07,2046.14 868.6,2103.6 866.95,2104.71 865,2105.1 729.51,2105.1 729.51,2141.73 729.12,2143.68 728.01,2145.34 726.36,2146.44 724.41,2146.83 546.4,2146.83 544.45,2146.44 542.8,2145.34 541.69,2143.68 541.3,2141.73 541.3,2057.23 359.06,1874.99 357.96,1873.34 357.57,1871.38 357.57,1576.88 357.49,1576.77 357.11,1574.82 357.49,1572.87 358.6,1571.22 374.37,1555.45 376.02,1554.35 377.97,1553.96 502.78,1553.96 502.78,1531.5 503.16,1529.55 504.27,1527.89 528.18,1503.98 529.84,1502.87 531.79,1502.49 551.65,1502.49 552.77,1502.71 553.89,1502.49 578.04,1502.49 578.04,1413.09 578.04,1401.86 578.04,1265.7 551.65,1265.7 549.04,1265.36 546.61,1264.35 544.52,1262.75 484.48,1202.71 336.51,1202.71 333.9,1202.37 331.47,1201.36 329.38,1199.76 100.87,971.24 99.27,969.15 98.26,966.72 97.91,964.11 97.91,843.39 97.91,662.61 98.26,660 99.27,657.57 100.87,655.48 122.91,633.44 122.91,20.1 20.1,20.1 20.1,2224 2263.37,2224
VDDARM-SW1AB on POWER2 (split plane): 1939.78,1773.01 1939.78,1173.57 1937.75,1172.01 1934.82,1169.09 1550.34,1169.09 1550.34,1538.95 1549.95,1540.9 1548.84,1542.55 1517.23,1574.17 1515.58,1575.27 1513.63,1575.66 815.25,1575.66 813.3,1575.27 811.65,1574.17 768.51,1531.03 767.41,1529.38 767.02,1527.43 767.02,1507.58 767.02,1202.71 526.17,1202.71 526.17,1474.89 553.76,1502.49 583.14,1502.49 585.09,1502.87 586.74,1503.98 618.23,1535.47 619.34,1537.12 619.72,1539.07 619.72,1570.57 619.34,1572.52 618.23,1574.17 586.72,1605.68 585.07,1606.78 583.12,1607.17 553.75,1607.17 525.25,1635.68 525.25,1841.73 616.42,1932.9 1779.89,1932.9
VDDSOC-SW1C on POWER2 (split plane): 1540.14,1536.84 1540.14,1169.09 1116.37,1169.09 1113.76,1168.74 1111.33,1167.74 1109.24,1166.13 1107.64,1164.04 1107.55,1163.83 1107.33,1163.74 1105.24,1162.13 1055.58,1112.47 999.79,1168.26 997.7,1169.86 995.27,1170.87 992.66,1171.21 933.78,1171.21 905.23,1199.76 903.14,1201.36 900.71,1202.37 898.1,1202.71 777.22,1202.71 777.22,1525.31 817.37,1565.46 1511.51,1565.46
MAIN-POWER on POWER2 (split plane): 1864.9,826.34 1865.29,824.39 1866.39,822.74 1868.05,821.63 1870,821.25 2263.37,821.25 2263.37,365.09 1589.07,365.09 1589.07,497.47 1588.73,500.08 1587.72,502.51 1586.12,504.6 1540.59,550.13 1538.5,551.73 1536.06,552.74 1533.45,553.09 1467.42,553.09 1283.76,736.74 1281.67,738.35 1279.24,739.36 1276.63,739.7 1245.79,739.7 1244.35,741.13 1187.09,798.4 1187.09,976.78 1186.74,979.39 1185.74,981.83 1184.13,983.91 1069.84,1098.2 1119.51,1147.87 1120.31,1148.91 1864.9,1148.91
P3V0-VDDHIGH-SW2 on POWER2 (split plane): 2099.9,1867.89 2099.9,1324 2099.9,1128 2099.9,831.44 1875.1,831.44 1875.1,1148.91 1939,1148.91 1941.61,1149.26 1944.04,1150.26 1946.13,1151.87 1952.01,1157.75 1953.62,1159.84 1954.62,1162.27 1954.97,1164.88 1954.62,1167.49 1953.62,1169.93 1952.01,1172.01 1949.98,1173.57 1949.98,1775.12 1949.59,1777.07 1948.49,1778.72 1785.6,1941.6 1783.95,1942.71 1782,1943.1 619.41,1943.1 619.41,2134.9 1832.89,2134.9
PMIC-VSNVS on POWER2 (split plane): 2263.37,831.44 2110.1,831.44 2110.1,1128 2110.1,1324 2110.1,1870 2109.71,1871.95 2108.6,1873.6 1838.6,2143.6 1836.95,2144.71 1835,2145.1 614.31,2145.1 612.36,2144.71 610.7,2143.6 609.6,2141.95 609.21,2140 609.21,1940.11 518.04,1848.94 259.58,1848.94 215.1,1893.42 215.1,2224 2263.37,2224
P0V75-REFDDR on POWER2 (split plane): 922.47,1153.99 924.55,1152.39 926.28,1151.68 926.99,1151.38 929.6,1151.04 988.48,1151.04 1166.91,972.6 1166.91,794.22 1167.26,791.61 1168.26,789.18 1169.87,787.09 1230.09,726.87 1234.48,722.48 1236.57,720.88 1237.78,720.37 1239,719.87 1241.61,719.53 1272.45,719.53 1456.11,535.87 1458.2,534.26 1460.63,533.26 1463.24,532.91 1529.28,532.91 1568.9,493.29 1568.9,285.16 1377.82,94.09 329.52,94.09 143.09,280.52 143.09,984.93 340.69,1182.54 893.92,1182.54
GND on POWER2 (split plane): 204.9,1891.31 205.29,1889.36 206.39,1887.71 253.87,1840.24 255.52,1839.13 257.47,1838.74 515.05,1838.74 515.05,1633.56 515.44,1631.61 516.55,1629.96 548.04,1598.47 549.69,1597.36 551.64,1596.98 581.01,1596.98 609.53,1568.46 609.53,1541.18 581.03,1512.68 551.65,1512.68 549.7,1512.29 548.05,1511.19 517.46,1480.6 516.36,1478.95 515.97,1477 515.97,1202.71 336.51,1202.71 333.9,1202.37 332.9,1201.95 331.47,1201.36 329.38,1199.76 125.87,996.24 124.27,994.15 123.26,991.72 122.91,989.11 122.91,276.34 123.26,273.73 124.27,271.3 125.87,269.21 318.21,76.87 320.3,75.26 322.73,74.26 325.34,73.91 1382,73.91 1384.61,74.26 1387.04,75.26 1389.13,76.87 1586.12,273.85 1587.72,275.94 1588.43,277.66 1588.73,278.37 1589.07,280.98 1589.07,344.91 2263.37,344.91 2263.37,20.1 20.1,20.1 20.1,2224 204.9,2224
GND on GND2 (split plane): 2263.37,20.1 20.1,20.1 20.1,2224 2263.37,2224

## Keep-outs
Keep-Out Layer:
  the board outline again, w5.91

## Other copper
Top Layer:
  pour cut-out: 2150.07,2008.39 2150.18,2008.49 2245.23,2008.49 2245.23,1914 2150.07,1914
  pour cut-out: 1912.72,137.59 1912.82,137.69 2007.87,137.69 2007.87,43.2 1912.72,43.2
  pour cut-out: 247.29,137.69 247.4,137.8 342.45,137.8 342.45,43.31 247.29,43.31
  pour cut-out: 193.49,976.95 165.35,948.82 165.35,854.33 215.77,803.91 1184.29,803.91 1184.29,892.95 1196.85,905.51 1196.85,976.38 1185,988.23 1185,1103.34 1185,1121.87 1184.29,1122.58 1114.17,1192.61 1113.77,1192.2 1113.77,976.95
  pour cut-out: 273.55,1817.82 1113.68,1817.82 1113.77,1817.73 1113.77,976.95 272.99,976.95
  pour cut-out: 1393.93,2094.47 1716.53,2094.5 1716.57,1775.64 1393.05,1775.55
Bottom Layer:
  pour cut-out: 1913.05,137.69 1913.16,137.8 2008.21,137.8 2008.21,43.31 1913.05,43.31
  pour cut-out: 78.74,956.69 173.89,956.8 173.89,862.31 126.32,862.31 78.74,862.31
  pour cut-out: 1444.22,2220.37 1444.32,2220.47 1539.37,2220.47 1539.37,2125.98 1444.22,2125.98
  pour cut-out: 272.99,976.95 273.56,976.38 1114.17,976.38 1114.17,1814.96 552.24,1814.96 532.55,1795.28 476.38,1795.28 476.38,1649.61 271.65,1649.61 271.65,1632.16
  pour cut-out: 320.82,826.77 320.82,986.17 381.89,1047.24 1045.48,1047.24 1128.16,1129.92 1174.4,1129.92 1188.98,1115.34 1188.98,1092.43 1169.29,1072.75 1169.29,1003.94 1207.38,965.85 1207.38,844.52 1181.75,818.9 320.82,818.9
  pour cut-out: 1727.46,1652 1751.11,1628.35 1751.11,1302.11 1745,1296 1687.73,1296 1678.28,1305.46 1678.28,1621.97 1667.87,1632.38 1667.87,1648.91 1670.96,1652
POWER1 (plane layer: these items are gaps in the copper):
  lines w10: 362.2,1574.82 377.97,1559.06 507.87,1559.06 507.87,1531.5 531.79,1507.58 551.65,1507.58 ; 362.67,1574.8 362.67,1871.38 546.4,2055.12 546.4,2141.73 724.41,2141.73 724.41,2082.68 ; 553.89,1507.58 583.14,1507.58 ; 555,1605 560.57,1599.42 617.78,1542.22 600,1524.45 583.14,1507.58 ; 583.14,1255.61 583.14,1401.86 583.14,1413.09 583.14,1507.58 ; 615.28,1539.72 697,1621.45 922.47,1846.91 922.47,2042.53 865,2100 724.41,2100 724.41,2005 749,2005 821,2005 821,1922 709.13,1810.13 709.13,1759.56 570.57,1621 557.46,1607.89 488.65,1676.71 488.65,1728.04 724.41,1963.8 724.41,2024.59 ; 664,1587 697,1554 697,1404.28 697,1255
  lines w20: 1459.35,547 1799,547 1874,472 1874,0 1114.6,0 133,0 133,637.61 108,662.61 108,843.39 108,964.11 336.51,1192.62 488.66,1192.62 551.65,1255.61 778,1255.61 840.99,1318.6 859.39,1337 879.7,1337 898.09,1318.6 929.6,1287.1 929.6,1192.62 ; 1496,547 1430,547 1429,548 1251.38,725.62 1251.38,754.98 1251.38,1065.51 1254,1068.13 1221.13,1101 1129.52,1192.61 929.61,1192.61 ; 929.6,1192.62 929.61,1192.61
POWER2 (plane layer: these items are gaps in the copper):
  lines w10: 210,2245 210,1891.31 257.47,1843.84 520.15,1843.84 ; 521.07,1193.54 521.07,1477 551.65,1507.58 583.14,1507.58 614.63,1539.07 614.63,1570.57 583.12,1602.07 551.64,1602.07 520.15,1633.56 520.15,1843.84 ; 772.12,1192.62 772.12,1527.43 ; 772.12,1507.58 772.12,1527.43 ; 898.11,1570.56 815.25,1570.56 ; 1545.24,1156 1545.24,1538.95 1513.63,1570.56 815.25,1570.56 ; 1870,1155.12 1870,826.34 2282.12,826.34 2283.46,825 ; 1944.88,1164.88 1944.88,1775.12 1782,1938 614.31,1938 ; 2076.06,826.34 2105,826.34 2105,1128 2105,1324 2105,1870 1835,2140 660.61,2140 614.31,2140 614.31,1938 ; 520.15,1843.84 614.31,1938 ; 772.12,1527.43 815.25,1570.56
  lines w20: 1055.58,1098.2 1112.37,1155 ; 1116.37,1159 1939,1159 1944.88,1164.88 ; 1578.98,355 2283.46,355 ; 133,276.34 133,989.11 336.51,1192.62 457.16,1192.62 898.1,1192.62 929.6,1161.12 992.66,1161.12 1177,976.78 1177,794.22 1237.22,734 1241.61,729.61 1276.63,729.61 1463.24,543 1533.45,543 1578.98,497.47 1578.98,280.98 1382,84 325.34,84 133,276.34
Multi-Layer:
  pour cut-out: 451.33,273.39 451.33,107.39 382.33,107.39 382.33,271.39 224.33,271.39 216.33,279.39 216.33,806.88 235.84,826.39 592.33,826.39 1179.38,826.34 1183.38,822.34 1183.38,277.34 1173.38,267.34 1018.38,267.34 1018.38,112.34 943.38,112.34 943.38,267.34 743.38,267.34 738.38,262.34 738.38,112.34 658.38,112.34 658.38,267.34 653.38,272.34 606.28,272.34 605.33,271.39 453.33,271.39

## Silkscreen, mask and mechanical layers (free items; w line width, h text height)
Top Overlay:
  text "DCETVT18CPU-REV.1" at 547.24,59.06 h40
Mechanical 30:
  lines w4: 1323,1310 1323,1280 1333,1280 1473,1280 1483,1280 1483,1310 ; 1393,1280 1393,1260 1413,1240 1813,1240 1863,1190 1863,1000 1993,870 ; 1513,1310 1513,1280 1673,1280 1673,1310 ; 1593,1280 1593,1270 1603,1260 2053,1260 2063,1270 2063,1690 ; 1993,870 1983,860 1983,540 2003,520 2183,520 2193,530 2193,860 2183,870 2053,870 1993,870 ; 1923,1720 1953,1690 2133,1690 2143,1700 2143,2030 2133,2040 1943,2040 1923,2020 1923,1720

## Text inside footprints (layer, text, board x,y; h text height)
J2: Bottom Overlay "1" at 2060.04,1929.72 h39.37 r90; Bottom Overlay "2" at 2213.58,1937.6 h39.37 r90
U3: Mechanical 30 "25" at 1063,1840 h30; Mechanical 30 "1" at 321,1832 h30; Mechanical 30 "A" at 237,1762 h30; Mechanical 30 "AE" at 303,920 h30
U7: Mechanical 31 "1" at 590,850 h30; Mechanical 31 "A" at 624.38,774 h30
U8: Mechanical 30 "1" at 318.68,839.33 h30 r90; Mechanical 30 "A" at 251.81,802.46 h30 r90
U9: Mechanical 31 "1" at 1106,856 h30; Mechanical 31 "A" at 1181,776 h30
U10: Mechanical 30 "1" at 885.61,839.33 h30 r90; Mechanical 30 "A" at 818.74,802.46 h30 r90